# Altium PCB LED_Matrix.PcbDoc (part 1 of 2)
Units mm, origin at the board's own origin, x right, y up, seen from the top; angles counter-clockwise.
Board outline 50 x 80 mm, 2 copper layers (Top Layer, Bottom Layer); 384 components, 49 nets, 1536 pads, 0 vias.
Unrouted connection lines stored in the file: 1487.
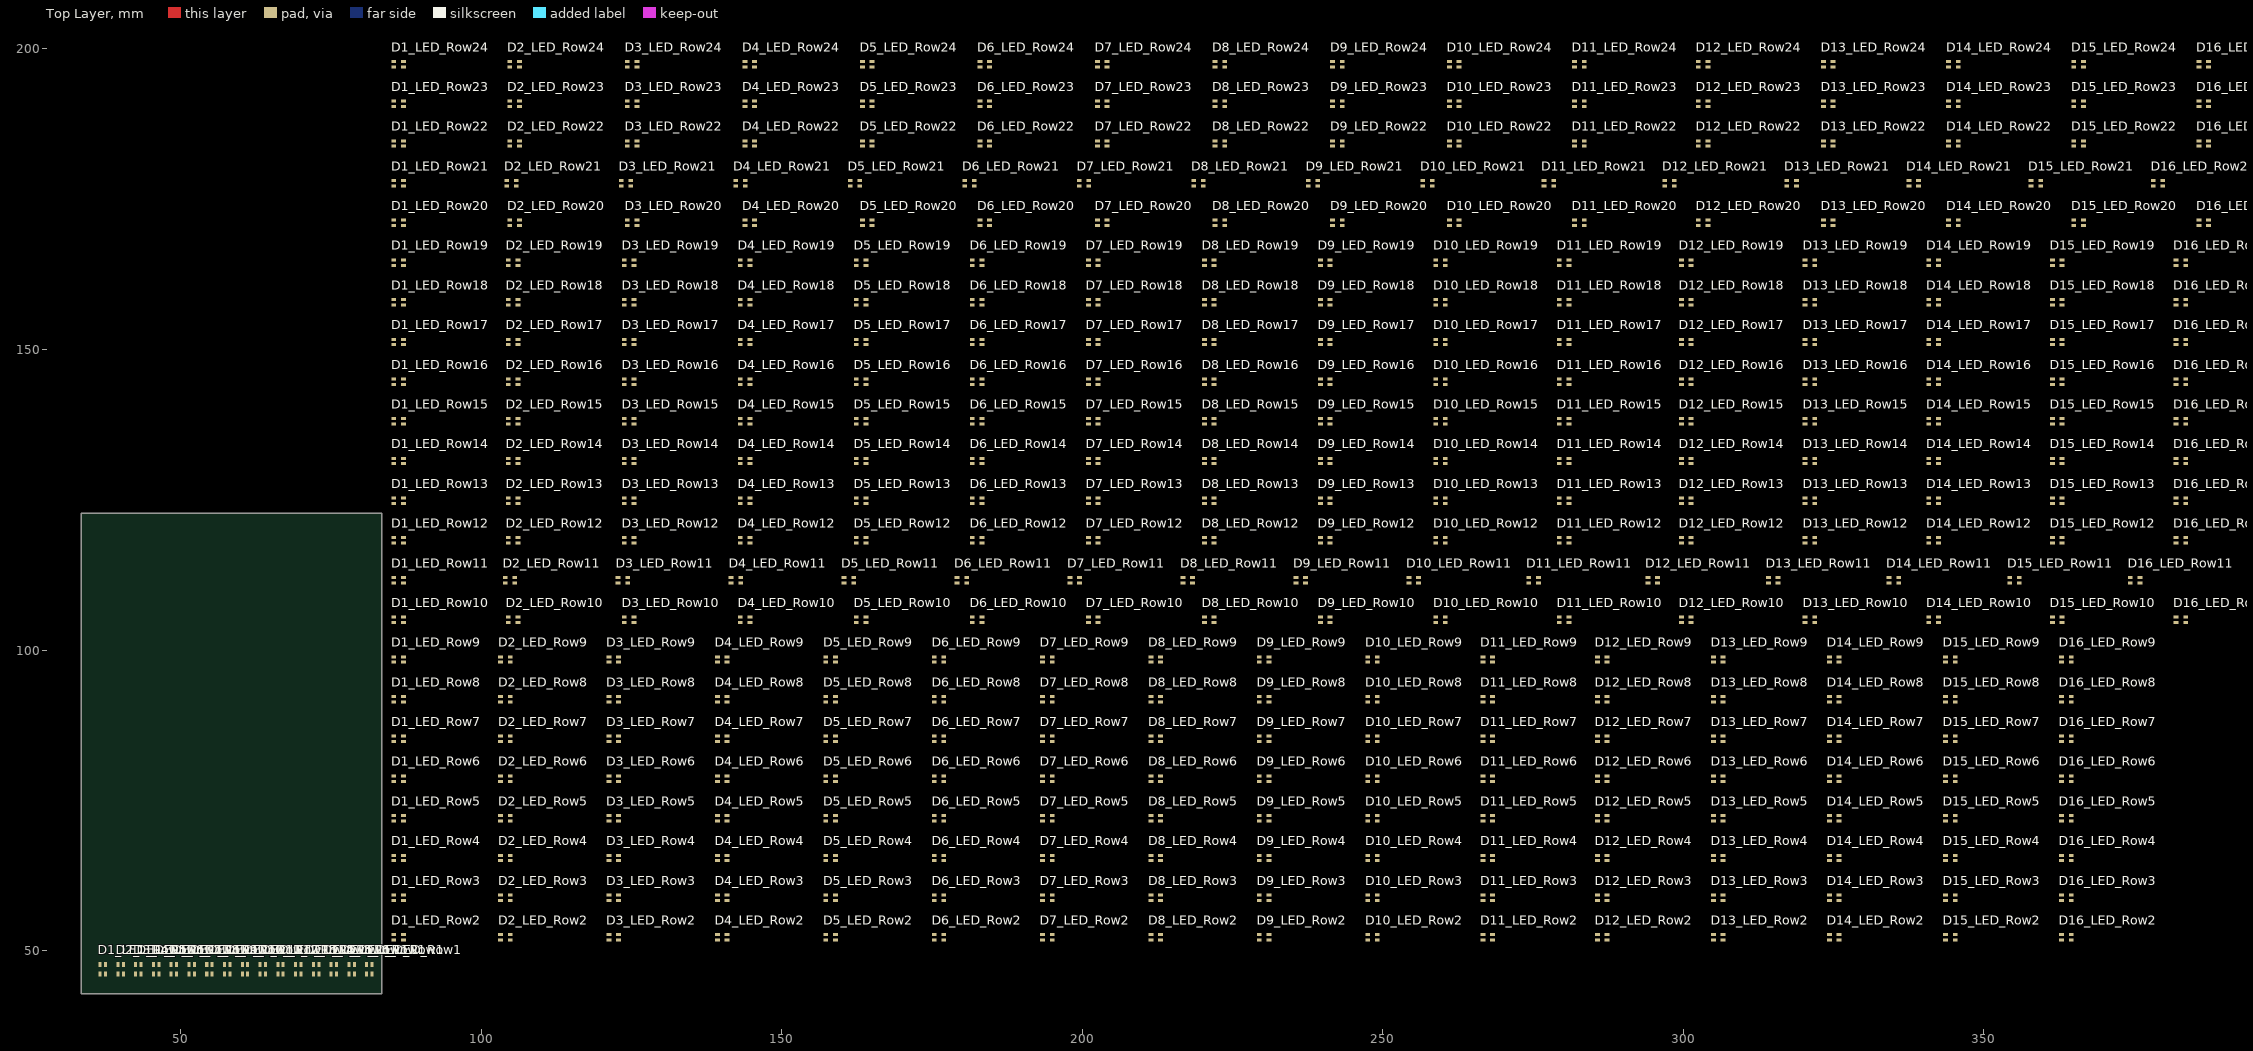
[diagram p0: Top Layer view]
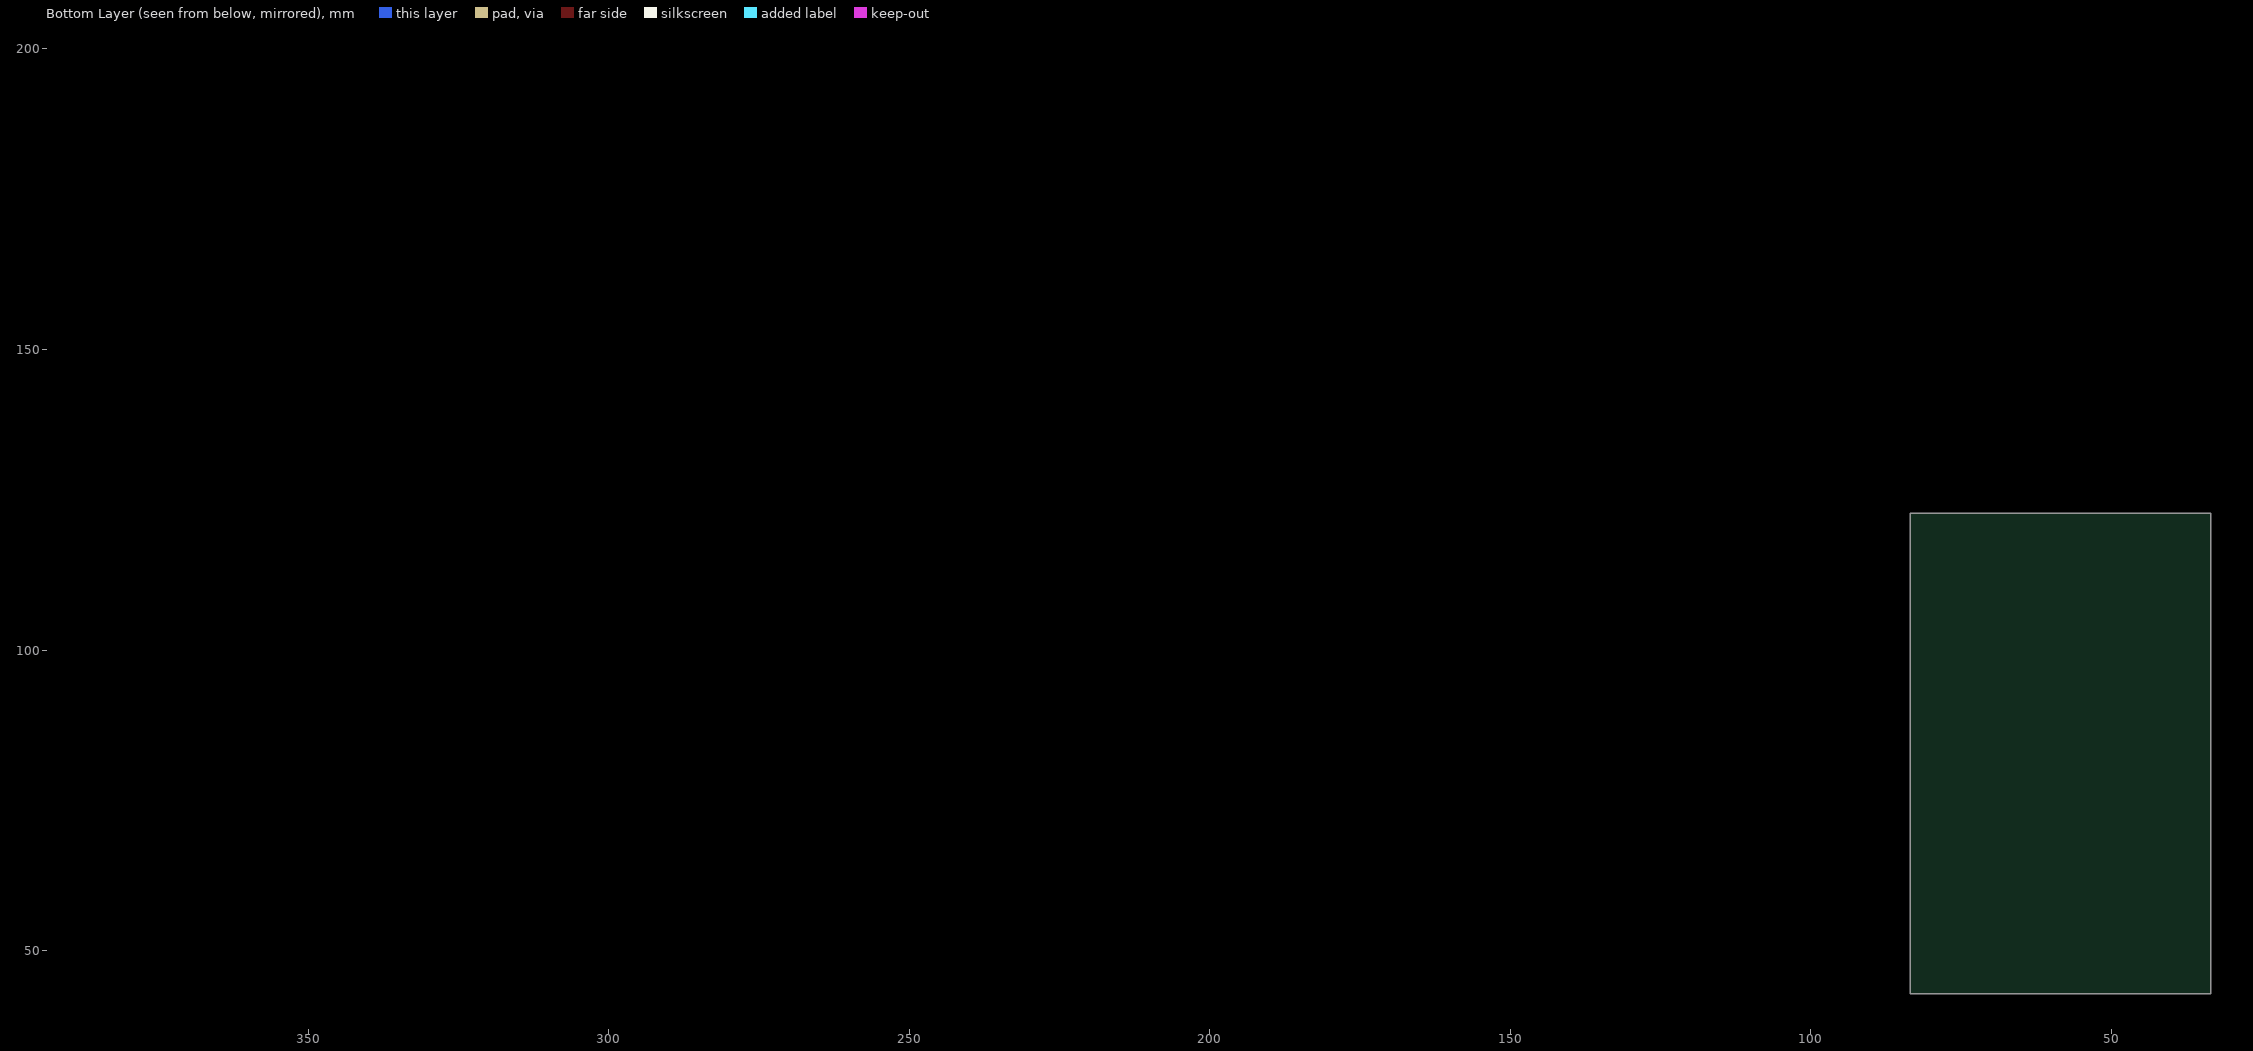
[diagram p1: Bottom Layer view, seen from below]

## Layer stack, top to bottom
Top Solder: solder mask 0.0102, Solder Resist, Dk 3.5
Top Layer: signal copper 0.0356
Dielectric 1: dielectric 0.32, FR-4, Dk 4.8
Bottom Layer: signal copper 0.0356
Bottom Solder: solder mask 0.0102, Solder Resist, Dk 3.5

## Board outline
33.401,42.799 33.401,122.799 83.401,122.799 83.401,42.799

## Design rules (kind name [scope] priority, off if disabled: settings)
Clearance [All] p1: gap=0.254 ignorepadtopadclearanceinfootprint=FALSE except(0: Arc-Hole Track-Hole SMDPad-Hole THPad-Hole Via-Hole Fill-Hole Poly-Hole Region-Hole Text-Hole)
PolygonConnect [All] p1: connectstyle=Relief reliefconductorwidth=0.254 reliefentries=4 polygonreliefangle="90 Angle" airgapwidth=0.254
RoomDefinition LED_Row1 [InComponentClass('LED_Row1')] p1: confinementstyle=ConfineIn formatcopy=TRUE lockcomponents=FALSE outline 33.401,44.292 83.401,44.292 83.401,49.626 33.401,49.626
RoomDefinition LED_Row24 [InComponentClass('LED_Row24')] p2: confinementstyle=ConfineIn formatcopy=TRUE lockcomponents=FALSE outline 84.582,196.215 404.876,196.215 404.876,201.549 84.582,201.549
RoomDefinition LED_Row23 [InComponentClass('LED_Row23')] p3: confinementstyle=ConfineIn formatcopy=TRUE lockcomponents=FALSE outline 84.582,189.611 404.876,189.611 404.876,194.945 84.582,194.945
RoomDefinition LED_Row22 [InComponentClass('LED_Row22')] p4: confinementstyle=ConfineIn formatcopy=TRUE lockcomponents=FALSE outline 84.582,183.007 404.876,183.007 404.876,188.341 84.582,188.341
RoomDefinition LED_Row21 [InComponentClass('LED_Row21')] p5: confinementstyle=ConfineIn formatcopy=TRUE lockcomponents=FALSE outline 84.582,176.403 396.748,176.403 396.748,181.737 84.582,181.737
RoomDefinition LED_Row20 [InComponentClass('LED_Row20')] p6: confinementstyle=ConfineIn formatcopy=TRUE lockcomponents=FALSE outline 84.582,169.799 404.876,169.799 404.876,175.133 84.582,175.133
RoomDefinition LED_Row19 [InComponentClass('LED_Row19')] p7: confinementstyle=ConfineIn formatcopy=TRUE lockcomponents=FALSE outline 84.582,163.195 400.812,163.195 400.812,168.529 84.582,168.529
RoomDefinition LED_Row18 [InComponentClass('LED_Row18')] p8: confinementstyle=ConfineIn formatcopy=TRUE lockcomponents=FALSE outline 84.582,156.591 400.812,156.591 400.812,161.925 84.582,161.925
RoomDefinition LED_Row17 [InComponentClass('LED_Row17')] p9: confinementstyle=ConfineIn formatcopy=TRUE lockcomponents=FALSE outline 84.582,149.987 400.812,149.987 400.812,155.321 84.582,155.321
RoomDefinition LED_Row16 [InComponentClass('LED_Row16')] p10: confinementstyle=ConfineIn formatcopy=TRUE lockcomponents=FALSE outline 84.582,143.383 400.812,143.383 400.812,148.717 84.582,148.717
RoomDefinition LED_Row15 [InComponentClass('LED_Row15')] p11: confinementstyle=ConfineIn formatcopy=TRUE lockcomponents=FALSE outline 84.582,136.779 400.812,136.779 400.812,142.113 84.582,142.113
RoomDefinition LED_Row14 [InComponentClass('LED_Row14')] p12: confinementstyle=ConfineIn formatcopy=TRUE lockcomponents=FALSE outline 84.582,130.175 400.812,130.175 400.812,135.509 84.582,135.509
RoomDefinition LED_Row13 [InComponentClass('LED_Row13')] p13: confinementstyle=ConfineIn formatcopy=TRUE lockcomponents=FALSE outline 84.582,123.571 400.812,123.571 400.812,128.905 84.582,128.905
RoomDefinition LED_Row12 [InComponentClass('LED_Row12')] p14: confinementstyle=ConfineIn formatcopy=TRUE lockcomponents=FALSE outline 84.582,116.967 400.812,116.967 400.812,122.301 84.582,122.301
RoomDefinition LED_Row11 [InComponentClass('LED_Row11')] p15: confinementstyle=ConfineIn formatcopy=TRUE lockcomponents=FALSE outline 84.582,110.363 392.684,110.363 392.684,115.697 84.582,115.697
RoomDefinition LED_Row10 [InComponentClass('LED_Row10')] p16: confinementstyle=ConfineIn formatcopy=TRUE lockcomponents=FALSE outline 84.582,103.759 400.812,103.759 400.812,109.093 84.582,109.093
RoomDefinition LED_Row9 [InComponentClass('LED_Row9')] p17: confinementstyle=ConfineIn formatcopy=TRUE lockcomponents=FALSE outline 84.582,97.155 380.492,97.155 380.492,102.489 84.582,102.489
RoomDefinition LED_Row8 [InComponentClass('LED_Row8')] p18: confinementstyle=ConfineIn formatcopy=TRUE lockcomponents=FALSE outline 84.582,90.551 380.492,90.551 380.492,95.885 84.582,95.885
RoomDefinition LED_Row7 [InComponentClass('LED_Row7')] p19: confinementstyle=ConfineIn formatcopy=TRUE lockcomponents=FALSE outline 84.582,83.947 380.492,83.947 380.492,89.281 84.582,89.281
RoomDefinition LED_Row6 [InComponentClass('LED_Row6')] p20: confinementstyle=ConfineIn formatcopy=TRUE lockcomponents=FALSE outline 84.582,77.343 380.492,77.343 380.492,82.677 84.582,82.677
RoomDefinition LED_Row5 [InComponentClass('LED_Row5')] p21: confinementstyle=ConfineIn formatcopy=TRUE lockcomponents=FALSE outline 84.582,70.739 380.492,70.739 380.492,76.073 84.582,76.073
RoomDefinition LED_Row4 [InComponentClass('LED_Row4')] p22: confinementstyle=ConfineIn formatcopy=TRUE lockcomponents=FALSE outline 84.582,64.135 380.492,64.135 380.492,69.469 84.582,69.469
RoomDefinition LED_Row3 [InComponentClass('LED_Row3')] p23: confinementstyle=ConfineIn formatcopy=TRUE lockcomponents=FALSE outline 84.582,57.531 380.492,57.531 380.492,62.865 84.582,62.865
RoomDefinition LED_Row2 [InComponentClass('LED_Row2')] p24: confinementstyle=ConfineIn formatcopy=TRUE lockcomponents=FALSE outline 84.582,50.927 380.492,50.927 380.492,56.261 84.582,56.261
RoutingVias [All] p1: holewidth=0.711 width=1.27 viastyle="Through Hole" minholewidth=0.711 minwidth=1.27 maxholewidth=0.711 maxwidth=1.27
SolderMaskExpansion [All] p1: expansion=0.102 istentingtop=FALSE
Width [All] p1: maxlimit=0.254 minlimit=0.254 preferedwidth=0.254
30 further rules are at their usual default settings.

## Classes and differential pairs
channel class LED_Row: LED_Row1 LED_Row2 LED_Row3 LED_Row4 LED_Row5 LED_Row6 LED_Row7 LED_Row8 LED_Row9 LED_Row10 LED_Row11 LED_Row12 LED_Row13 LED_Row14 LED_Row15 LED_Row16 LED_Row17 LED_Row18 LED_Row19 LED_Row20 LED_Row21 LED_Row22 LED_Row23 LED_Row24
component class LED_Row24: D1_LED_Row24 D2_LED_Row24 D3_LED_Row24 D4_LED_Row24 D5_LED_Row24 D6_LED_Row24 D7_LED_Row24 D8_LED_Row24 D9_LED_Row24 D10_LED_Row24 D11_LED_Row24 D12_LED_Row24 D13_LED_Row24 D14_LED_Row24 D15_LED_Row24 D16_LED_Row24
component class LED_Row23: D1_LED_Row23 D2_LED_Row23 D3_LED_Row23 D4_LED_Row23 D5_LED_Row23 D6_LED_Row23 D7_LED_Row23 D8_LED_Row23 D9_LED_Row23 D10_LED_Row23 D11_LED_Row23 D12_LED_Row23 D13_LED_Row23 D14_LED_Row23 D15_LED_Row23 D16_LED_Row23
component class LED_Row22: D1_LED_Row22 D2_LED_Row22 D3_LED_Row22 D4_LED_Row22 D5_LED_Row22 D6_LED_Row22 D7_LED_Row22 D8_LED_Row22 D9_LED_Row22 D10_LED_Row22 D11_LED_Row22 D12_LED_Row22 D13_LED_Row22 D14_LED_Row22 D15_LED_Row22 D16_LED_Row22
component class LED_Row21: D1_LED_Row21 D2_LED_Row21 D3_LED_Row21 D4_LED_Row21 D5_LED_Row21 D6_LED_Row21 D7_LED_Row21 D8_LED_Row21 D9_LED_Row21 D10_LED_Row21 D11_LED_Row21 D12_LED_Row21 D13_LED_Row21 D14_LED_Row21 D15_LED_Row21 D16_LED_Row21
component class LED_Row20: D1_LED_Row20 D2_LED_Row20 D3_LED_Row20 D4_LED_Row20 D5_LED_Row20 D6_LED_Row20 D7_LED_Row20 D8_LED_Row20 D9_LED_Row20 D10_LED_Row20 D11_LED_Row20 D12_LED_Row20 D13_LED_Row20 D14_LED_Row20 D15_LED_Row20 D16_LED_Row20
component class LED_Row19: D1_LED_Row19 D2_LED_Row19 D3_LED_Row19 D4_LED_Row19 D5_LED_Row19 D6_LED_Row19 D7_LED_Row19 D8_LED_Row19 D9_LED_Row19 D10_LED_Row19 D11_LED_Row19 D12_LED_Row19 D13_LED_Row19 D14_LED_Row19 D15_LED_Row19 D16_LED_Row19
component class LED_Row18: D1_LED_Row18 D2_LED_Row18 D3_LED_Row18 D4_LED_Row18 D5_LED_Row18 D6_LED_Row18 D7_LED_Row18 D8_LED_Row18 D9_LED_Row18 D10_LED_Row18 D11_LED_Row18 D12_LED_Row18 D13_LED_Row18 D14_LED_Row18 D15_LED_Row18 D16_LED_Row18
component class LED_Row17: D1_LED_Row17 D2_LED_Row17 D3_LED_Row17 D4_LED_Row17 D5_LED_Row17 D6_LED_Row17 D7_LED_Row17 D8_LED_Row17 D9_LED_Row17 D10_LED_Row17 D11_LED_Row17 D12_LED_Row17 D13_LED_Row17 D14_LED_Row17 D15_LED_Row17 D16_LED_Row17
component class LED_Row16: D1_LED_Row16 D2_LED_Row16 D3_LED_Row16 D4_LED_Row16 D5_LED_Row16 D6_LED_Row16 D7_LED_Row16 D8_LED_Row16 D9_LED_Row16 D10_LED_Row16 D11_LED_Row16 D12_LED_Row16 D13_LED_Row16 D14_LED_Row16 D15_LED_Row16 D16_LED_Row16
component class LED_Row15: D1_LED_Row15 D2_LED_Row15 D3_LED_Row15 D4_LED_Row15 D5_LED_Row15 D6_LED_Row15 D7_LED_Row15 D8_LED_Row15 D9_LED_Row15 D10_LED_Row15 D11_LED_Row15 D12_LED_Row15 D13_LED_Row15 D14_LED_Row15 D15_LED_Row15 D16_LED_Row15
component class LED_Row14: D1_LED_Row14 D2_LED_Row14 D3_LED_Row14 D4_LED_Row14 D5_LED_Row14 D6_LED_Row14 D7_LED_Row14 D8_LED_Row14 D9_LED_Row14 D10_LED_Row14 D11_LED_Row14 D12_LED_Row14 D13_LED_Row14 D14_LED_Row14 D15_LED_Row14 D16_LED_Row14
component class LED_Row13: D1_LED_Row13 D2_LED_Row13 D3_LED_Row13 D4_LED_Row13 D5_LED_Row13 D6_LED_Row13 D7_LED_Row13 D8_LED_Row13 D9_LED_Row13 D10_LED_Row13 D11_LED_Row13 D12_LED_Row13 D13_LED_Row13 D14_LED_Row13 D15_LED_Row13 D16_LED_Row13
component class LED_Row12: D1_LED_Row12 D2_LED_Row12 D3_LED_Row12 D4_LED_Row12 D5_LED_Row12 D6_LED_Row12 D7_LED_Row12 D8_LED_Row12 D9_LED_Row12 D10_LED_Row12 D11_LED_Row12 D12_LED_Row12 D13_LED_Row12 D14_LED_Row12 D15_LED_Row12 D16_LED_Row12
component class LED_Row11: D1_LED_Row11 D2_LED_Row11 D3_LED_Row11 D4_LED_Row11 D5_LED_Row11 D6_LED_Row11 D7_LED_Row11 D8_LED_Row11 D9_LED_Row11 D10_LED_Row11 D11_LED_Row11 D12_LED_Row11 D13_LED_Row11 D14_LED_Row11 D15_LED_Row11 D16_LED_Row11
component class LED_Row10: D1_LED_Row10 D2_LED_Row10 D3_LED_Row10 D4_LED_Row10 D5_LED_Row10 D6_LED_Row10 D7_LED_Row10 D8_LED_Row10 D9_LED_Row10 D10_LED_Row10 D11_LED_Row10 D12_LED_Row10 D13_LED_Row10 D14_LED_Row10 D15_LED_Row10 D16_LED_Row10
component class LED_Row9: D1_LED_Row9 D2_LED_Row9 D3_LED_Row9 D4_LED_Row9 D5_LED_Row9 D6_LED_Row9 D7_LED_Row9 D8_LED_Row9 D9_LED_Row9 D10_LED_Row9 D11_LED_Row9 D12_LED_Row9 D13_LED_Row9 D14_LED_Row9 D15_LED_Row9 D16_LED_Row9
component class LED_Row8: D1_LED_Row8 D2_LED_Row8 D3_LED_Row8 D4_LED_Row8 D5_LED_Row8 D6_LED_Row8 D7_LED_Row8 D8_LED_Row8 D9_LED_Row8 D10_LED_Row8 D11_LED_Row8 D12_LED_Row8 D13_LED_Row8 D14_LED_Row8 D15_LED_Row8 D16_LED_Row8
component class LED_Row7: D1_LED_Row7 D2_LED_Row7 D3_LED_Row7 D4_LED_Row7 D5_LED_Row7 D6_LED_Row7 D7_LED_Row7 D8_LED_Row7 D9_LED_Row7 D10_LED_Row7 D11_LED_Row7 D12_LED_Row7 D13_LED_Row7 D14_LED_Row7 D15_LED_Row7 D16_LED_Row7
component class LED_Row6: D1_LED_Row6 D2_LED_Row6 D3_LED_Row6 D4_LED_Row6 D5_LED_Row6 D6_LED_Row6 D7_LED_Row6 D8_LED_Row6 D9_LED_Row6 D10_LED_Row6 D11_LED_Row6 D12_LED_Row6 D13_LED_Row6 D14_LED_Row6 D15_LED_Row6 D16_LED_Row6
component class LED_Row5: D1_LED_Row5 D2_LED_Row5 D3_LED_Row5 D4_LED_Row5 D5_LED_Row5 D6_LED_Row5 D7_LED_Row5 D8_LED_Row5 D9_LED_Row5 D10_LED_Row5 D11_LED_Row5 D12_LED_Row5 D13_LED_Row5 D14_LED_Row5 D15_LED_Row5 D16_LED_Row5
component class LED_Row4: D1_LED_Row4 D2_LED_Row4 D3_LED_Row4 D4_LED_Row4 D5_LED_Row4 D6_LED_Row4 D7_LED_Row4 D8_LED_Row4 D9_LED_Row4 D10_LED_Row4 D11_LED_Row4 D12_LED_Row4 D13_LED_Row4 D14_LED_Row4 D15_LED_Row4 D16_LED_Row4
component class LED_Row3: D1_LED_Row3 D2_LED_Row3 D3_LED_Row3 D4_LED_Row3 D5_LED_Row3 D6_LED_Row3 D7_LED_Row3 D8_LED_Row3 D9_LED_Row3 D10_LED_Row3 D11_LED_Row3 D12_LED_Row3 D13_LED_Row3 D14_LED_Row3 D15_LED_Row3 D16_LED_Row3
component class LED_Row2: D1_LED_Row2 D2_LED_Row2 D3_LED_Row2 D4_LED_Row2 D5_LED_Row2 D6_LED_Row2 D7_LED_Row2 D8_LED_Row2 D9_LED_Row2 D10_LED_Row2 D11_LED_Row2 D12_LED_Row2 D13_LED_Row2 D14_LED_Row2 D15_LED_Row2 D16_LED_Row2
component class LED_Row1: D1_LED_Row1 D2_LED_Row1 D3_LED_Row1 D4_LED_Row1 D5_LED_Row1 D6_LED_Row1 D7_LED_Row1 D8_LED_Row1 D9_LED_Row1 D10_LED_Row1 D11_LED_Row1 D12_LED_Row1 D13_LED_Row1 D14_LED_Row1 D15_LED_Row1 D16_LED_Row1

## Components (designator, comment, footprint, x,y, rotation, side; value= is the part's Value field where it differs from the comment)
D1_LED_Row1 "LED-RGB-0000" LED-RGB-0000 37.032,46.901 r180 top (schematic designator D1)
D1_LED_Row2 "LED-RGB-0000" LED-RGB-0000 86.233,52.197 r90 top (schematic designator D1)
D1_LED_Row3 "LED-RGB-0000" LED-RGB-0000 86.233,58.801 r90 top (schematic designator D1)
D1_LED_Row4 "LED-RGB-0000" LED-RGB-0000 86.233,65.405 r90 top (schematic designator D1)
D1_LED_Row5 "LED-RGB-0000" LED-RGB-0000 86.233,72.009 r90 top (schematic designator D1)
D1_LED_Row6 "LED-RGB-0000" LED-RGB-0000 86.233,78.613 r90 top (schematic designator D1)
D1_LED_Row7 "LED-RGB-0000" LED-RGB-0000 86.233,85.217 r90 top (schematic designator D1)
D1_LED_Row8 "LED-RGB-0000" LED-RGB-0000 86.233,91.821 r90 top (schematic designator D1)
D1_LED_Row9 "LED-RGB-0000" LED-RGB-0000 86.233,98.425 r90 top (schematic designator D1)
D1_LED_Row10 "LED-RGB-0000" LED-RGB-0000 86.233,105.029 r90 top (schematic designator D1)
D1_LED_Row11 "LED-RGB-0000" LED-RGB-0000 86.233,111.633 r90 top (schematic designator D1)
D1_LED_Row12 "LED-RGB-0000" LED-RGB-0000 86.233,118.237 r90 top (schematic designator D1)
D1_LED_Row13 "LED-RGB-0000" LED-RGB-0000 86.233,124.841 r90 top (schematic designator D1)
D1_LED_Row14 "LED-RGB-0000" LED-RGB-0000 86.233,131.445 r90 top (schematic designator D1)
D1_LED_Row15 "LED-RGB-0000" LED-RGB-0000 86.233,138.049 r90 top (schematic designator D1)
D1_LED_Row16 "LED-RGB-0000" LED-RGB-0000 86.233,144.653 r90 top (schematic designator D1)
D1_LED_Row17 "LED-RGB-0000" LED-RGB-0000 86.233,151.257 r90 top (schematic designator D1)
D1_LED_Row18 "LED-RGB-0000" LED-RGB-0000 86.233,157.861 r90 top (schematic designator D1)
D1_LED_Row19 "LED-RGB-0000" LED-RGB-0000 86.233,164.465 r90 top (schematic designator D1)
D1_LED_Row20 "LED-RGB-0000" LED-RGB-0000 86.233,171.069 r90 top (schematic designator D1)
D1_LED_Row21 "LED-RGB-0000" LED-RGB-0000 86.233,177.673 r90 top (schematic designator D1)
D1_LED_Row22 "LED-RGB-0000" LED-RGB-0000 86.233,184.277 r90 top (schematic designator D1)
D1_LED_Row23 "LED-RGB-0000" LED-RGB-0000 86.233,190.881 r90 top (schematic designator D1)
D1_LED_Row24 "LED-RGB-0000" LED-RGB-0000 86.233,197.485 r90 top (schematic designator D1)
D2_LED_Row1 "LED-RGB-0000" LED-RGB-0000 39.989,46.901 r180 top (schematic designator D2)
D2_LED_Row2 "LED-RGB-0000" LED-RGB-0000 104.013,52.197 r90 top (schematic designator D2)
D2_LED_Row3 "LED-RGB-0000" LED-RGB-0000 104.013,58.801 r90 top (schematic designator D2)
D2_LED_Row4 "LED-RGB-0000" LED-RGB-0000 104.013,65.405 r90 top (schematic designator D2)
D2_LED_Row5 "LED-RGB-0000" LED-RGB-0000 104.013,72.009 r90 top (schematic designator D2)
D2_LED_Row6 "LED-RGB-0000" LED-RGB-0000 104.013,78.613 r90 top (schematic designator D2)
D2_LED_Row7 "LED-RGB-0000" LED-RGB-0000 104.013,85.217 r90 top (schematic designator D2)
D2_LED_Row8 "LED-RGB-0000" LED-RGB-0000 104.013,91.821 r90 top (schematic designator D2)
D2_LED_Row9 "LED-RGB-0000" LED-RGB-0000 104.013,98.425 r90 top (schematic designator D2)
D2_LED_Row10 "LED-RGB-0000" LED-RGB-0000 105.283,105.029 r90 top (schematic designator D2)
D2_LED_Row11 "LED-RGB-0000" LED-RGB-0000 104.775,111.633 r90 top (schematic designator D2)
D2_LED_Row12 "LED-RGB-0000" LED-RGB-0000 105.283,118.237 r90 top (schematic designator D2)
D2_LED_Row13 "LED-RGB-0000" LED-RGB-0000 105.283,124.841 r90 top (schematic designator D2)
D2_LED_Row14 "LED-RGB-0000" LED-RGB-0000 105.283,131.445 r90 top (schematic designator D2)
D2_LED_Row15 "LED-RGB-0000" LED-RGB-0000 105.283,138.049 r90 top (schematic designator D2)
D2_LED_Row16 "LED-RGB-0000" LED-RGB-0000 105.283,144.653 r90 top (schematic designator D2)
D2_LED_Row17 "LED-RGB-0000" LED-RGB-0000 105.283,151.257 r90 top (schematic designator D2)
D2_LED_Row18 "LED-RGB-0000" LED-RGB-0000 105.283,157.861 r90 top (schematic designator D2)
D2_LED_Row19 "LED-RGB-0000" LED-RGB-0000 105.283,164.465 r90 top (schematic designator D2)
D2_LED_Row20 "LED-RGB-0000" LED-RGB-0000 105.537,171.069 r90 top (schematic designator D2)
D2_LED_Row21 "LED-RGB-0000" LED-RGB-0000 105.029,177.673 r90 top (schematic designator D2)
D2_LED_Row22 "LED-RGB-0000" LED-RGB-0000 105.537,184.277 r90 top (schematic designator D2)
D2_LED_Row23 "LED-RGB-0000" LED-RGB-0000 105.537,190.881 r90 top (schematic designator D2)
D2_LED_Row24 "LED-RGB-0000" LED-RGB-0000 105.537,197.485 r90 top (schematic designator D2)
D3_LED_Row1 "LED-RGB-0000" LED-RGB-0000 42.946,46.901 r180 top (schematic designator D3)
D3_LED_Row2 "LED-RGB-0000" LED-RGB-0000 122.047,52.197 r90 top (schematic designator D3)
D3_LED_Row3 "LED-RGB-0000" LED-RGB-0000 122.047,58.801 r90 top (schematic designator D3)
D3_LED_Row4 "LED-RGB-0000" LED-RGB-0000 122.047,65.405 r90 top (schematic designator D3)
D3_LED_Row5 "LED-RGB-0000" LED-RGB-0000 122.047,72.009 r90 top (schematic designator D3)
D3_LED_Row6 "LED-RGB-0000" LED-RGB-0000 122.047,78.613 r90 top (schematic designator D3)
D3_LED_Row7 "LED-RGB-0000" LED-RGB-0000 122.047,85.217 r90 top (schematic designator D3)
D3_LED_Row8 "LED-RGB-0000" LED-RGB-0000 122.047,91.821 r90 top (schematic designator D3)
D3_LED_Row9 "LED-RGB-0000" LED-RGB-0000 122.047,98.425 r90 top (schematic designator D3)
D3_LED_Row10 "LED-RGB-0000" LED-RGB-0000 124.587,105.029 r90 top (schematic designator D3)
D3_LED_Row11 "LED-RGB-0000" LED-RGB-0000 123.571,111.633 r90 top (schematic designator D3)
D3_LED_Row12 "LED-RGB-0000" LED-RGB-0000 124.587,118.237 r90 top (schematic designator D3)
D3_LED_Row13 "LED-RGB-0000" LED-RGB-0000 124.587,124.841 r90 top (schematic designator D3)
D3_LED_Row14 "LED-RGB-0000" LED-RGB-0000 124.587,131.445 r90 top (schematic designator D3)
D3_LED_Row15 "LED-RGB-0000" LED-RGB-0000 124.587,138.049 r90 top (schematic designator D3)
D3_LED_Row16 "LED-RGB-0000" LED-RGB-0000 124.587,144.653 r90 top (schematic designator D3)
D3_LED_Row17 "LED-RGB-0000" LED-RGB-0000 124.587,151.257 r90 top (schematic designator D3)
D3_LED_Row18 "LED-RGB-0000" LED-RGB-0000 124.587,157.861 r90 top (schematic designator D3)
D3_LED_Row19 "LED-RGB-0000" LED-RGB-0000 124.587,164.465 r90 top (schematic designator D3)
D3_LED_Row20 "LED-RGB-0000" LED-RGB-0000 125.095,171.069 r90 top (schematic designator D3)
D3_LED_Row21 "LED-RGB-0000" LED-RGB-0000 124.079,177.673 r90 top (schematic designator D3)
D3_LED_Row22 "LED-RGB-0000" LED-RGB-0000 125.095,184.277 r90 top (schematic designator D3)
D3_LED_Row23 "LED-RGB-0000" LED-RGB-0000 125.095,190.881 r90 top (schematic designator D3)
D3_LED_Row24 "LED-RGB-0000" LED-RGB-0000 125.095,197.485 r90 top (schematic designator D3)
D4_LED_Row1 "LED-RGB-0000" LED-RGB-0000 45.903,46.901 r180 top (schematic designator D4)
D4_LED_Row2 "LED-RGB-0000" LED-RGB-0000 140.081,52.197 r90 top (schematic designator D4)
D4_LED_Row3 "LED-RGB-0000" LED-RGB-0000 140.081,58.801 r90 top (schematic designator D4)
D4_LED_Row4 "LED-RGB-0000" LED-RGB-0000 140.081,65.405 r90 top (schematic designator D4)
D4_LED_Row5 "LED-RGB-0000" LED-RGB-0000 140.081,72.009 r90 top (schematic designator D4)
D4_LED_Row6 "LED-RGB-0000" LED-RGB-0000 140.081,78.613 r90 top (schematic designator D4)
D4_LED_Row7 "LED-RGB-0000" LED-RGB-0000 140.081,85.217 r90 top (schematic designator D4)
D4_LED_Row8 "LED-RGB-0000" LED-RGB-0000 140.081,91.821 r90 top (schematic designator D4)
D4_LED_Row9 "LED-RGB-0000" LED-RGB-0000 140.081,98.425 r90 top (schematic designator D4)
D4_LED_Row10 "LED-RGB-0000" LED-RGB-0000 143.891,105.029 r90 top (schematic designator D4)
D4_LED_Row11 "LED-RGB-0000" LED-RGB-0000 142.367,111.633 r90 top (schematic designator D4)
D4_LED_Row12 "LED-RGB-0000" LED-RGB-0000 143.891,118.237 r90 top (schematic designator D4)
D4_LED_Row13 "LED-RGB-0000" LED-RGB-0000 143.891,124.841 r90 top (schematic designator D4)
D4_LED_Row14 "LED-RGB-0000" LED-RGB-0000 143.891,131.445 r90 top (schematic designator D4)
D4_LED_Row15 "LED-RGB-0000" LED-RGB-0000 143.891,138.049 r90 top (schematic designator D4)
D4_LED_Row16 "LED-RGB-0000" LED-RGB-0000 143.891,144.653 r90 top (schematic designator D4)
D4_LED_Row17 "LED-RGB-0000" LED-RGB-0000 143.891,151.257 r90 top (schematic designator D4)
D4_LED_Row18 "LED-RGB-0000" LED-RGB-0000 143.891,157.861 r90 top (schematic designator D4)
D4_LED_Row19 "LED-RGB-0000" LED-RGB-0000 143.891,164.465 r90 top (schematic designator D4)
D4_LED_Row20 "LED-RGB-0000" LED-RGB-0000 144.653,171.069 r90 top (schematic designator D4)
D4_LED_Row21 "LED-RGB-0000" LED-RGB-0000 143.129,177.673 r90 top (schematic designator D4)
D4_LED_Row22 "LED-RGB-0000" LED-RGB-0000 144.653,184.277 r90 top (schematic designator D4)
D4_LED_Row23 "LED-RGB-0000" LED-RGB-0000 144.653,190.881 r90 top (schematic designator D4)
D4_LED_Row24 "LED-RGB-0000" LED-RGB-0000 144.653,197.485 r90 top (schematic designator D4)
D5_LED_Row1 "LED-RGB-0000" LED-RGB-0000 48.859,46.901 r180 top (schematic designator D5)
D5_LED_Row2 "LED-RGB-0000" LED-RGB-0000 158.115,52.197 r90 top (schematic designator D5)
D5_LED_Row3 "LED-RGB-0000" LED-RGB-0000 158.115,58.801 r90 top (schematic designator D5)
D5_LED_Row4 "LED-RGB-0000" LED-RGB-0000 158.115,65.405 r90 top (schematic designator D5)
D5_LED_Row5 "LED-RGB-0000" LED-RGB-0000 158.115,72.009 r90 top (schematic designator D5)
D5_LED_Row6 "LED-RGB-0000" LED-RGB-0000 158.115,78.613 r90 top (schematic designator D5)
D5_LED_Row7 "LED-RGB-0000" LED-RGB-0000 158.115,85.217 r90 top (schematic designator D5)
D5_LED_Row8 "LED-RGB-0000" LED-RGB-0000 158.115,91.821 r90 top (schematic designator D5)
D5_LED_Row9 "LED-RGB-0000" LED-RGB-0000 158.115,98.425 r90 top (schematic designator D5)
D5_LED_Row10 "LED-RGB-0000" LED-RGB-0000 163.195,105.029 r90 top (schematic designator D5)
D5_LED_Row11 "LED-RGB-0000" LED-RGB-0000 161.163,111.633 r90 top (schematic designator D5)
D5_LED_Row12 "LED-RGB-0000" LED-RGB-0000 163.195,118.237 r90 top (schematic designator D5)
D5_LED_Row13 "LED-RGB-0000" LED-RGB-0000 163.195,124.841 r90 top (schematic designator D5)
D5_LED_Row14 "LED-RGB-0000" LED-RGB-0000 163.195,131.445 r90 top (schematic designator D5)
D5_LED_Row15 "LED-RGB-0000" LED-RGB-0000 163.195,138.049 r90 top (schematic designator D5)
D5_LED_Row16 "LED-RGB-0000" LED-RGB-0000 163.195,144.653 r90 top (schematic designator D5)
D5_LED_Row17 "LED-RGB-0000" LED-RGB-0000 163.195,151.257 r90 top (schematic designator D5)
D5_LED_Row18 "LED-RGB-0000" LED-RGB-0000 163.195,157.861 r90 top (schematic designator D5)
D5_LED_Row19 "LED-RGB-0000" LED-RGB-0000 163.195,164.465 r90 top (schematic designator D5)
D5_LED_Row20 "LED-RGB-0000" LED-RGB-0000 164.211,171.069 r90 top (schematic designator D5)
D5_LED_Row21 "LED-RGB-0000" LED-RGB-0000 162.179,177.673 r90 top (schematic designator D5)
D5_LED_Row22 "LED-RGB-0000" LED-RGB-0000 164.211,184.277 r90 top (schematic designator D5)
D5_LED_Row23 "LED-RGB-0000" LED-RGB-0000 164.211,190.881 r90 top (schematic designator D5)
D5_LED_Row24 "LED-RGB-0000" LED-RGB-0000 164.211,197.485 r90 top (schematic designator D5)
D6_LED_Row1 "LED-RGB-0000" LED-RGB-0000 51.816,46.901 r180 top (schematic designator D6)
D6_LED_Row2 "LED-RGB-0000" LED-RGB-0000 176.149,52.197 r90 top (schematic designator D6)
D6_LED_Row3 "LED-RGB-0000" LED-RGB-0000 176.149,58.801 r90 top (schematic designator D6)
D6_LED_Row4 "LED-RGB-0000" LED-RGB-0000 176.149,65.405 r90 top (schematic designator D6)
D6_LED_Row5 "LED-RGB-0000" LED-RGB-0000 176.149,72.009 r90 top (schematic designator D6)
D6_LED_Row6 "LED-RGB-0000" LED-RGB-0000 176.149,78.613 r90 top (schematic designator D6)
D6_LED_Row7 "LED-RGB-0000" LED-RGB-0000 176.149,85.217 r90 top (schematic designator D6)
D6_LED_Row8 "LED-RGB-0000" LED-RGB-0000 176.149,91.821 r90 top (schematic designator D6)
D6_LED_Row9 "LED-RGB-0000" LED-RGB-0000 176.149,98.425 r90 top (schematic designator D6)
D6_LED_Row10 "LED-RGB-0000" LED-RGB-0000 182.499,105.029 r90 top (schematic designator D6)
D6_LED_Row11 "LED-RGB-0000" LED-RGB-0000 179.959,111.633 r90 top (schematic designator D6)
D6_LED_Row12 "LED-RGB-0000" LED-RGB-0000 182.499,118.237 r90 top (schematic designator D6)
D6_LED_Row13 "LED-RGB-0000" LED-RGB-0000 182.499,124.841 r90 top (schematic designator D6)
D6_LED_Row14 "LED-RGB-0000" LED-RGB-0000 182.499,131.445 r90 top (schematic designator D6)
D6_LED_Row15 "LED-RGB-0000" LED-RGB-0000 182.499,138.049 r90 top (schematic designator D6)
D6_LED_Row16 "LED-RGB-0000" LED-RGB-0000 182.499,144.653 r90 top (schematic designator D6)
D6_LED_Row17 "LED-RGB-0000" LED-RGB-0000 182.499,151.257 r90 top (schematic designator D6)
D6_LED_Row18 "LED-RGB-0000" LED-RGB-0000 182.499,157.861 r90 top (schematic designator D6)
D6_LED_Row19 "LED-RGB-0000" LED-RGB-0000 182.499,164.465 r90 top (schematic designator D6)
D6_LED_Row20 "LED-RGB-0000" LED-RGB-0000 183.769,171.069 r90 top (schematic designator D6)
D6_LED_Row21 "LED-RGB-0000" LED-RGB-0000 181.229,177.673 r90 top (schematic designator D6)
D6_LED_Row22 "LED-RGB-0000" LED-RGB-0000 183.769,184.277 r90 top (schematic designator D6)
D6_LED_Row23 "LED-RGB-0000" LED-RGB-0000 183.769,190.881 r90 top (schematic designator D6)
D6_LED_Row24 "LED-RGB-0000" LED-RGB-0000 183.769,197.485 r90 top (schematic designator D6)
D7_LED_Row1 "LED-RGB-0000" LED-RGB-0000 54.773,46.901 r180 top (schematic designator D7)
D7_LED_Row2 "LED-RGB-0000" LED-RGB-0000 194.183,52.197 r90 top (schematic designator D7)
D7_LED_Row3 "LED-RGB-0000" LED-RGB-0000 194.183,58.801 r90 top (schematic designator D7)
D7_LED_Row4 "LED-RGB-0000" LED-RGB-0000 194.183,65.405 r90 top (schematic designator D7)
D7_LED_Row5 "LED-RGB-0000" LED-RGB-0000 194.183,72.009 r90 top (schematic designator D7)
D7_LED_Row6 "LED-RGB-0000" LED-RGB-0000 194.183,78.613 r90 top (schematic designator D7)
D7_LED_Row7 "LED-RGB-0000" LED-RGB-0000 194.183,85.217 r90 top (schematic designator D7)
D7_LED_Row8 "LED-RGB-0000" LED-RGB-0000 194.183,91.821 r90 top (schematic designator D7)
D7_LED_Row9 "LED-RGB-0000" LED-RGB-0000 194.183,98.425 r90 top (schematic designator D7)
D7_LED_Row10 "LED-RGB-0000" LED-RGB-0000 201.803,105.029 r90 top (schematic designator D7)
D7_LED_Row11 "LED-RGB-0000" LED-RGB-0000 198.755,111.633 r90 top (schematic designator D7)
D7_LED_Row12 "LED-RGB-0000" LED-RGB-0000 201.803,118.237 r90 top (schematic designator D7)
D7_LED_Row13 "LED-RGB-0000" LED-RGB-0000 201.803,124.841 r90 top (schematic designator D7)
D7_LED_Row14 "LED-RGB-0000" LED-RGB-0000 201.803,131.445 r90 top (schematic designator D7)
D7_LED_Row15 "LED-RGB-0000" LED-RGB-0000 201.803,138.049 r90 top (schematic designator D7)
D7_LED_Row16 "LED-RGB-0000" LED-RGB-0000 201.803,144.653 r90 top (schematic designator D7)
D7_LED_Row17 "LED-RGB-0000" LED-RGB-0000 201.803,151.257 r90 top (schematic designator D7)
D7_LED_Row18 "LED-RGB-0000" LED-RGB-0000 201.803,157.861 r90 top (schematic designator D7)
D7_LED_Row19 "LED-RGB-0000" LED-RGB-0000 201.803,164.465 r90 top (schematic designator D7)
D7_LED_Row20 "LED-RGB-0000" LED-RGB-0000 203.327,171.069 r90 top (schematic designator D7)
D7_LED_Row21 "LED-RGB-0000" LED-RGB-0000 200.279,177.673 r90 top (schematic designator D7)
D7_LED_Row22 "LED-RGB-0000" LED-RGB-0000 203.327,184.277 r90 top (schematic designator D7)
D7_LED_Row23 "LED-RGB-0000" LED-RGB-0000 203.327,190.881 r90 top (schematic designator D7)
D7_LED_Row24 "LED-RGB-0000" LED-RGB-0000 203.327,197.485 r90 top (schematic designator D7)
D8_LED_Row1 "LED-RGB-0000" LED-RGB-0000 57.729,46.901 r180 top (schematic designator D8)
D8_LED_Row2 "LED-RGB-0000" LED-RGB-0000 212.217,52.197 r90 top (schematic designator D8)
D8_LED_Row3 "LED-RGB-0000" LED-RGB-0000 212.217,58.801 r90 top (schematic designator D8)
D8_LED_Row4 "LED-RGB-0000" LED-RGB-0000 212.217,65.405 r90 top (schematic designator D8)
D8_LED_Row5 "LED-RGB-0000" LED-RGB-0000 212.217,72.009 r90 top (schematic designator D8)
D8_LED_Row6 "LED-RGB-0000" LED-RGB-0000 212.217,78.613 r90 top (schematic designator D8)
D8_LED_Row7 "LED-RGB-0000" LED-RGB-0000 212.217,85.217 r90 top (schematic designator D8)
D8_LED_Row8 "LED-RGB-0000" LED-RGB-0000 212.217,91.821 r90 top (schematic designator D8)
D8_LED_Row9 "LED-RGB-0000" LED-RGB-0000 212.217,98.425 r90 top (schematic designator D8)
D8_LED_Row10 "LED-RGB-0000" LED-RGB-0000 221.107,105.029 r90 top (schematic designator D8)
D8_LED_Row11 "LED-RGB-0000" LED-RGB-0000 217.551,111.633 r90 top (schematic designator D8)
D8_LED_Row12 "LED-RGB-0000" LED-RGB-0000 221.107,118.237 r90 top (schematic designator D8)
D8_LED_Row13 "LED-RGB-0000" LED-RGB-0000 221.107,124.841 r90 top (schematic designator D8)
D8_LED_Row14 "LED-RGB-0000" LED-RGB-0000 221.107,131.445 r90 top (schematic designator D8)
D8_LED_Row15 "LED-RGB-0000" LED-RGB-0000 221.107,138.049 r90 top (schematic designator D8)
D8_LED_Row16 "LED-RGB-0000" LED-RGB-0000 221.107,144.653 r90 top (schematic designator D8)
D8_LED_Row17 "LED-RGB-0000" LED-RGB-0000 221.107,151.257 r90 top (schematic designator D8)
D8_LED_Row18 "LED-RGB-0000" LED-RGB-0000 221.107,157.861 r90 top (schematic designator D8)
D8_LED_Row19 "LED-RGB-0000" LED-RGB-0000 221.107,164.465 r90 top (schematic designator D8)
D8_LED_Row20 "LED-RGB-0000" LED-RGB-0000 222.885,171.069 r90 top (schematic designator D8)
D8_LED_Row21 "LED-RGB-0000" LED-RGB-0000 219.329,177.673 r90 top (schematic designator D8)
D8_LED_Row22 "LED-RGB-0000" LED-RGB-0000 222.885,184.277 r90 top (schematic designator D8)
D8_LED_Row23 "LED-RGB-0000" LED-RGB-0000 222.885,190.881 r90 top (schematic designator D8)
D8_LED_Row24 "LED-RGB-0000" LED-RGB-0000 222.885,197.485 r90 top (schematic designator D8)
D9_LED_Row1 "LED-RGB-0000" LED-RGB-0000 60.686,46.901 r180 top (schematic designator D9)
D9_LED_Row2 "LED-RGB-0000" LED-RGB-0000 230.251,52.197 r90 top (schematic designator D9)
D9_LED_Row3 "LED-RGB-0000" LED-RGB-0000 230.251,58.801 r90 top (schematic designator D9)
D9_LED_Row4 "LED-RGB-0000" LED-RGB-0000 230.251,65.405 r90 top (schematic designator D9)
D9_LED_Row5 "LED-RGB-0000" LED-RGB-0000 230.251,72.009 r90 top (schematic designator D9)
D9_LED_Row6 "LED-RGB-0000" LED-RGB-0000 230.251,78.613 r90 top (schematic designator D9)
D9_LED_Row7 "LED-RGB-0000" LED-RGB-0000 230.251,85.217 r90 top (schematic designator D9)
D9_LED_Row8 "LED-RGB-0000" LED-RGB-0000 230.251,91.821 r90 top (schematic designator D9)
D9_LED_Row9 "LED-RGB-0000" LED-RGB-0000 230.251,98.425 r90 top (schematic designator D9)
D9_LED_Row10 "LED-RGB-0000" LED-RGB-0000 240.411,105.029 r90 top (schematic designator D9)
D9_LED_Row11 "LED-RGB-0000" LED-RGB-0000 236.347,111.633 r90 top (schematic designator D9)
D9_LED_Row12 "LED-RGB-0000" LED-RGB-0000 240.411,118.237 r90 top (schematic designator D9)
D9_LED_Row13 "LED-RGB-0000" LED-RGB-0000 240.411,124.841 r90 top (schematic designator D9)
D9_LED_Row14 "LED-RGB-0000" LED-RGB-0000 240.411,131.445 r90 top (schematic designator D9)
D9_LED_Row15 "LED-RGB-0000" LED-RGB-0000 240.411,138.049 r90 top (schematic designator D9)
D9_LED_Row16 "LED-RGB-0000" LED-RGB-0000 240.411,144.653 r90 top (schematic designator D9)
D9_LED_Row17 "LED-RGB-0000" LED-RGB-0000 240.411,151.257 r90 top (schematic designator D9)
D9_LED_Row18 "LED-RGB-0000" LED-RGB-0000 240.411,157.861 r90 top (schematic designator D9)
D9_LED_Row19 "LED-RGB-0000" LED-RGB-0000 240.411,164.465 r90 top (schematic designator D9)
D9_LED_Row20 "LED-RGB-0000" LED-RGB-0000 242.443,171.069 r90 top (schematic designator D9)
D9_LED_Row21 "LED-RGB-0000" LED-RGB-0000 238.379,177.673 r90 top (schematic designator D9)
D9_LED_Row22 "LED-RGB-0000" LED-RGB-0000 242.443,184.277 r90 top (schematic designator D9)
D9_LED_Row23 "LED-RGB-0000" LED-RGB-0000 242.443,190.881 r90 top (schematic designator D9)
D9_LED_Row24 "LED-RGB-0000" LED-RGB-0000 242.443,197.485 r90 top (schematic designator D9)
D10_LED_Row1 "LED-RGB-0000" LED-RGB-0000 63.643,46.901 r180 top (schematic designator D10)
D10_LED_Row2 "LED-RGB-0000" LED-RGB-0000 248.285,52.197 r90 top (schematic designator D10)
D10_LED_Row3 "LED-RGB-0000" LED-RGB-0000 248.285,58.801 r90 top (schematic designator D10)
D10_LED_Row4 "LED-RGB-0000" LED-RGB-0000 248.285,65.405 r90 top (schematic designator D10)
D10_LED_Row5 "LED-RGB-0000" LED-RGB-0000 248.285,72.009 r90 top (schematic designator D10)
D10_LED_Row6 "LED-RGB-0000" LED-RGB-0000 248.285,78.613 r90 top (schematic designator D10)
D10_LED_Row7 "LED-RGB-0000" LED-RGB-0000 248.285,85.217 r90 top (schematic designator D10)
D10_LED_Row8 "LED-RGB-0000" LED-RGB-0000 248.285,91.821 r90 top (schematic designator D10)
D10_LED_Row9 "LED-RGB-0000" LED-RGB-0000 248.285,98.425 r90 top (schematic designator D10)
D10_LED_Row10 "LED-RGB-0000" LED-RGB-0000 259.588,105.029 r90 top (schematic designator D10)
D10_LED_Row11 "LED-RGB-0000" LED-RGB-0000 255.143,111.633 r90 top (schematic designator D10)
D10_LED_Row12 "LED-RGB-0000" LED-RGB-0000 259.588,118.237 r90 top (schematic designator D10)
D10_LED_Row13 "LED-RGB-0000" LED-RGB-0000 259.588,124.841 r90 top (schematic designator D10)
D10_LED_Row14 "LED-RGB-0000" LED-RGB-0000 259.588,131.445 r90 top (schematic designator D10)
D10_LED_Row15 "LED-RGB-0000" LED-RGB-0000 259.588,138.049 r90 top (schematic designator D10)
D10_LED_Row16 "LED-RGB-0000" LED-RGB-0000 259.588,144.653 r90 top (schematic designator D10)
D10_LED_Row17 "LED-RGB-0000" LED-RGB-0000 259.588,151.257 r90 top (schematic designator D10)
D10_LED_Row18 "LED-RGB-0000" LED-RGB-0000 259.588,157.861 r90 top (schematic designator D10)
D10_LED_Row19 "LED-RGB-0000" LED-RGB-0000 259.588,164.465 r90 top (schematic designator D10)
D10_LED_Row20 "LED-RGB-0000" LED-RGB-0000 261.874,171.069 r90 top (schematic designator D10)
D10_LED_Row21 "LED-RGB-0000" LED-RGB-0000 257.429,177.673 r90 top (schematic designator D10)
D10_LED_Row22 "LED-RGB-0000" LED-RGB-0000 261.874,184.277 r90 top (schematic designator D10)
D10_LED_Row23 "LED-RGB-0000" LED-RGB-0000 261.874,190.881 r90 top (schematic designator D10)
D10_LED_Row24 "LED-RGB-0000" LED-RGB-0000 261.874,197.485 r90 top (schematic designator D10)
D11_LED_Row1 "LED-RGB-0000" LED-RGB-0000 66.6,46.901 r180 top (schematic designator D11)
D11_LED_Row2 "LED-RGB-0000" LED-RGB-0000 267.462,52.197 r90 top (schematic designator D11)
D11_LED_Row3 "LED-RGB-0000" LED-RGB-0000 267.462,58.801 r90 top (schematic designator D11)
D11_LED_Row4 "LED-RGB-0000" LED-RGB-0000 267.462,65.405 r90 top (schematic designator D11)
D11_LED_Row5 "LED-RGB-0000" LED-RGB-0000 267.462,72.009 r90 top (schematic designator D11)
D11_LED_Row6 "LED-RGB-0000" LED-RGB-0000 267.462,78.613 r90 top (schematic designator D11)
D11_LED_Row7 "LED-RGB-0000" LED-RGB-0000 267.462,85.217 r90 top (schematic designator D11)
D11_LED_Row8 "LED-RGB-0000" LED-RGB-0000 267.462,91.821 r90 top (schematic designator D11)
D11_LED_Row9 "LED-RGB-0000" LED-RGB-0000 267.462,98.425 r90 top (schematic designator D11)
D11_LED_Row10 "LED-RGB-0000" LED-RGB-0000 280.162,105.029 r90 top (schematic designator D11)
D11_LED_Row11 "LED-RGB-0000" LED-RGB-0000 275.082,111.633 r90 top (schematic designator D11)
D11_LED_Row12 "LED-RGB-0000" LED-RGB-0000 280.162,118.237 r90 top (schematic designator D11)
D11_LED_Row13 "LED-RGB-0000" LED-RGB-0000 280.162,124.841 r90 top (schematic designator D11)
D11_LED_Row14 "LED-RGB-0000" LED-RGB-0000 280.162,131.445 r90 top (schematic designator D11)
D11_LED_Row15 "LED-RGB-0000" LED-RGB-0000 280.162,138.049 r90 top (schematic designator D11)
D11_LED_Row16 "LED-RGB-0000" LED-RGB-0000 280.162,144.653 r90 top (schematic designator D11)
D11_LED_Row17 "LED-RGB-0000" LED-RGB-0000 280.162,151.257 r90 top (schematic designator D11)
D11_LED_Row18 "LED-RGB-0000" LED-RGB-0000 280.162,157.861 r90 top (schematic designator D11)
D11_LED_Row19 "LED-RGB-0000" LED-RGB-0000 280.162,164.465 r90 top (schematic designator D11)
D11_LED_Row20 "LED-RGB-0000" LED-RGB-0000 282.702,171.069 r90 top (schematic designator D11)
D11_LED_Row21 "LED-RGB-0000" LED-RGB-0000 277.622,177.673 r90 top (schematic designator D11)
D11_LED_Row22 "LED-RGB-0000" LED-RGB-0000 282.702,184.277 r90 top (schematic designator D11)
D11_LED_Row23 "LED-RGB-0000" LED-RGB-0000 282.702,190.881 r90 top (schematic designator D11)
D11_LED_Row24 "LED-RGB-0000" LED-RGB-0000 282.702,197.485 r90 top (schematic designator D11)
D12_LED_Row1 "LED-RGB-0000" LED-RGB-0000 69.556,46.901 r180 top (schematic designator D12)
D12_LED_Row2 "LED-RGB-0000" LED-RGB-0000 286.512,52.197 r90 top (schematic designator D12)
D12_LED_Row3 "LED-RGB-0000" LED-RGB-0000 286.512,58.801 r90 top (schematic designator D12)
D12_LED_Row4 "LED-RGB-0000" LED-RGB-0000 286.512,65.405 r90 top (schematic designator D12)
D12_LED_Row5 "LED-RGB-0000" LED-RGB-0000 286.512,72.009 r90 top (schematic designator D12)
D12_LED_Row6 "LED-RGB-0000" LED-RGB-0000 286.512,78.613 r90 top (schematic designator D12)
D12_LED_Row7 "LED-RGB-0000" LED-RGB-0000 286.512,85.217 r90 top (schematic designator D12)
D12_LED_Row8 "LED-RGB-0000" LED-RGB-0000 286.512,91.821 r90 top (schematic designator D12)
D12_LED_Row9 "LED-RGB-0000" LED-RGB-0000 286.512,98.425 r90 top (schematic designator D12)
D12_LED_Row10 "LED-RGB-0000" LED-RGB-0000 300.482,105.029 r90 top (schematic designator D12)
D12_LED_Row11 "LED-RGB-0000" LED-RGB-0000 294.894,111.633 r90 top (schematic designator D12)
D12_LED_Row12 "LED-RGB-0000" LED-RGB-0000 300.482,118.237 r90 top (schematic designator D12)
D12_LED_Row13 "LED-RGB-0000" LED-RGB-0000 300.482,124.841 r90 top (schematic designator D12)
D12_LED_Row14 "LED-RGB-0000" LED-RGB-0000 300.482,131.445 r90 top (schematic designator D12)
D12_LED_Row15 "LED-RGB-0000" LED-RGB-0000 300.482,138.049 r90 top (schematic designator D12)
D12_LED_Row16 "LED-RGB-0000" LED-RGB-0000 300.482,144.653 r90 top (schematic designator D12)
D12_LED_Row17 "LED-RGB-0000" LED-RGB-0000 300.482,151.257 r90 top (schematic designator D12)
D12_LED_Row18 "LED-RGB-0000" LED-RGB-0000 300.482,157.861 r90 top (schematic designator D12)
D12_LED_Row19 "LED-RGB-0000" LED-RGB-0000 300.482,164.465 r90 top (schematic designator D12)
D12_LED_Row20 "LED-RGB-0000" LED-RGB-0000 303.276,171.069 r90 top (schematic designator D12)
D12_LED_Row21 "LED-RGB-0000" LED-RGB-0000 297.688,177.673 r90 top (schematic designator D12)
D12_LED_Row22 "LED-RGB-0000" LED-RGB-0000 303.276,184.277 r90 top (schematic designator D12)
D12_LED_Row23 "LED-RGB-0000" LED-RGB-0000 303.276,190.881 r90 top (schematic designator D12)
D12_LED_Row24 "LED-RGB-0000" LED-RGB-0000 303.276,197.485 r90 top (schematic designator D12)
D13_LED_Row1 "LED-RGB-0000" LED-RGB-0000 72.513,46.901 r180 top (schematic designator D13)
D13_LED_Row2 "LED-RGB-0000" LED-RGB-0000 305.816,52.197 r90 top (schematic designator D13)
D13_LED_Row3 "LED-RGB-0000" LED-RGB-0000 305.816,58.801 r90 top (schematic designator D13)
D13_LED_Row4 "LED-RGB-0000" LED-RGB-0000 305.816,65.405 r90 top (schematic designator D13)
D13_LED_Row5 "LED-RGB-0000" LED-RGB-0000 305.816,72.009 r90 top (schematic designator D13)
D13_LED_Row6 "LED-RGB-0000" LED-RGB-0000 305.816,78.613 r90 top (schematic designator D13)
D13_LED_Row7 "LED-RGB-0000" LED-RGB-0000 305.816,85.217 r90 top (schematic designator D13)
D13_LED_Row8 "LED-RGB-0000" LED-RGB-0000 305.816,91.821 r90 top (schematic designator D13)
D13_LED_Row9 "LED-RGB-0000" LED-RGB-0000 305.816,98.425 r90 top (schematic designator D13)
D13_LED_Row10 "LED-RGB-0000" LED-RGB-0000 321.056,105.029 r90 top (schematic designator D13)
D13_LED_Row11 "LED-RGB-0000" LED-RGB-0000 314.96,111.633 r90 top (schematic designator D13)
D13_LED_Row12 "LED-RGB-0000" LED-RGB-0000 321.056,118.237 r90 top (schematic designator D13)
D13_LED_Row13 "LED-RGB-0000" LED-RGB-0000 321.056,124.841 r90 top (schematic designator D13)
D13_LED_Row14 "LED-RGB-0000" LED-RGB-0000 321.056,131.445 r90 top (schematic designator D13)
D13_LED_Row15 "LED-RGB-0000" LED-RGB-0000 321.056,138.049 r90 top (schematic designator D13)
D13_LED_Row16 "LED-RGB-0000" LED-RGB-0000 321.056,144.653 r90 top (schematic designator D13)
D13_LED_Row17 "LED-RGB-0000" LED-RGB-0000 321.056,151.257 r90 top (schematic designator D13)
D13_LED_Row18 "LED-RGB-0000" LED-RGB-0000 321.056,157.861 r90 top (schematic designator D13)
D13_LED_Row19 "LED-RGB-0000" LED-RGB-0000 321.056,164.465 r90 top (schematic designator D13)
D13_LED_Row20 "LED-RGB-0000" LED-RGB-0000 324.104,171.069 r90 top (schematic designator D13)
D13_LED_Row21 "LED-RGB-0000" LED-RGB-0000 318.008,177.673 r90 top (schematic designator D13)
D13_LED_Row22 "LED-RGB-0000" LED-RGB-0000 324.104,184.277 r90 top (schematic designator D13)
D13_LED_Row23 "LED-RGB-0000" LED-RGB-0000 324.104,190.881 r90 top (schematic designator D13)
D13_LED_Row24 "LED-RGB-0000" LED-RGB-0000 324.104,197.485 r90 top (schematic designator D13)
D14_LED_Row1 "LED-RGB-0000" LED-RGB-0000 75.47,46.901 r180 top (schematic designator D14)
D14_LED_Row2 "LED-RGB-0000" LED-RGB-0000 325.12,52.197 r90 top (schematic designator D14)
D14_LED_Row3 "LED-RGB-0000" LED-RGB-0000 325.12,58.801 r90 top (schematic designator D14)
D14_LED_Row4 "LED-RGB-0000" LED-RGB-0000 325.12,65.405 r90 top (schematic designator D14)
D14_LED_Row5 "LED-RGB-0000" LED-RGB-0000 325.12,72.009 r90 top (schematic designator D14)
D14_LED_Row6 "LED-RGB-0000" LED-RGB-0000 325.12,78.613 r90 top (schematic designator D14)
D14_LED_Row7 "LED-RGB-0000" LED-RGB-0000 325.12,85.217 r90 top (schematic designator D14)
D14_LED_Row8 "LED-RGB-0000" LED-RGB-0000 325.12,91.821 r90 top (schematic designator D14)
D14_LED_Row9 "LED-RGB-0000" LED-RGB-0000 325.12,98.425 r90 top (schematic designator D14)
D14_LED_Row10 "LED-RGB-0000" LED-RGB-0000 341.63,105.029 r90 top (schematic designator D14)
D14_LED_Row11 "LED-RGB-0000" LED-RGB-0000 335.026,111.633 r90 top (schematic designator D14)
D14_LED_Row12 "LED-RGB-0000" LED-RGB-0000 341.63,118.237 r90 top (schematic designator D14)
D14_LED_Row13 "LED-RGB-0000" LED-RGB-0000 341.63,124.841 r90 top (schematic designator D14)
D14_LED_Row14 "LED-RGB-0000" LED-RGB-0000 341.63,131.445 r90 top (schematic designator D14)
D14_LED_Row15 "LED-RGB-0000" LED-RGB-0000 341.63,138.049 r90 top (schematic designator D14)
D14_LED_Row16 "LED-RGB-0000" LED-RGB-0000 341.63,144.653 r90 top (schematic designator D14)
D14_LED_Row17 "LED-RGB-0000" LED-RGB-0000 341.63,151.257 r90 top (schematic designator D14)
D14_LED_Row18 "LED-RGB-0000" LED-RGB-0000 341.63,157.861 r90 top (schematic designator D14)
D14_LED_Row19 "LED-RGB-0000" LED-RGB-0000 341.63,164.465 r90 top (schematic designator D14)
D14_LED_Row20 "LED-RGB-0000" LED-RGB-0000 344.932,171.069 r90 top (schematic designator D14)
D14_LED_Row21 "LED-RGB-0000" LED-RGB-0000 338.328,177.673 r90 top (schematic designator D14)
D14_LED_Row22 "LED-RGB-0000" LED-RGB-0000 344.932,184.277 r90 top (schematic designator D14)
D14_LED_Row23 "LED-RGB-0000" LED-RGB-0000 344.932,190.881 r90 top (schematic designator D14)
D14_LED_Row24 "LED-RGB-0000" LED-RGB-0000 344.932,197.485 r90 top (schematic designator D14)
D15_LED_Row1 "LED-RGB-0000" LED-RGB-0000 78.427,46.901 r180 top (schematic designator D15)
D15_LED_Row2 "LED-RGB-0000" LED-RGB-0000 344.424,52.197 r90 top (schematic designator D15)
D15_LED_Row3 "LED-RGB-0000" LED-RGB-0000 344.424,58.801 r90 top (schematic designator D15)
D15_LED_Row4 "LED-RGB-0000" LED-RGB-0000 344.424,65.405 r90 top (schematic designator D15)
D15_LED_Row5 "LED-RGB-0000" LED-RGB-0000 344.424,72.009 r90 top (schematic designator D15)
D15_LED_Row6 "LED-RGB-0000" LED-RGB-0000 344.424,78.613 r90 top (schematic designator D15)
D15_LED_Row7 "LED-RGB-0000" LED-RGB-0000 344.424,85.217 r90 top (schematic designator D15)
D15_LED_Row8 "LED-RGB-0000" LED-RGB-0000 344.424,91.821 r90 top (schematic designator D15)
D15_LED_Row9 "LED-RGB-0000" LED-RGB-0000 344.424,98.425 r90 top (schematic designator D15)
D15_LED_Row10 "LED-RGB-0000" LED-RGB-0000 362.204,105.029 r90 top (schematic designator D15)
D15_LED_Row11 "LED-RGB-0000" LED-RGB-0000 355.092,111.633 r90 top (schematic designator D15)
D15_LED_Row12 "LED-RGB-0000" LED-RGB-0000 362.204,118.237 r90 top (schematic designator D15)
D15_LED_Row13 "LED-RGB-0000" LED-RGB-0000 362.204,124.841 r90 top (schematic designator D15)
D15_LED_Row14 "LED-RGB-0000" LED-RGB-0000 362.204,131.445 r90 top (schematic designator D15)
D15_LED_Row15 "LED-RGB-0000" LED-RGB-0000 362.204,138.049 r90 top (schematic designator D15)
D15_LED_Row16 "LED-RGB-0000" LED-RGB-0000 362.204,144.653 r90 top (schematic designator D15)
D15_LED_Row17 "LED-RGB-0000" LED-RGB-0000 362.204,151.257 r90 top (schematic designator D15)
D15_LED_Row18 "LED-RGB-0000" LED-RGB-0000 362.204,157.861 r90 top (schematic designator D15)
D15_LED_Row19 "LED-RGB-0000" LED-RGB-0000 362.204,164.465 r90 top (schematic designator D15)
D15_LED_Row20 "LED-RGB-0000" LED-RGB-0000 365.76,171.069 r90 top (schematic designator D15)
D15_LED_Row21 "LED-RGB-0000" LED-RGB-0000 358.648,177.673 r90 top (schematic designator D15)
D15_LED_Row22 "LED-RGB-0000" LED-RGB-0000 365.76,184.277 r90 top (schematic designator D15)
D15_LED_Row23 "LED-RGB-0000" LED-RGB-0000 365.76,190.881 r90 top (schematic designator D15)
D15_LED_Row24 "LED-RGB-0000" LED-RGB-0000 365.76,197.485 r90 top (schematic designator D15)
D16_LED_Row1 "LED-RGB-0000" LED-RGB-0000 81.383,46.901 r180 top (schematic designator D16)
D16_LED_Row2 "LED-RGB-0000" LED-RGB-0000 363.728,52.197 r90 top (schematic designator D16)
D16_LED_Row3 "LED-RGB-0000" LED-RGB-0000 363.728,58.801 r90 top (schematic designator D16)
D16_LED_Row4 "LED-RGB-0000" LED-RGB-0000 363.728,65.405 r90 top (schematic designator D16)
D16_LED_Row5 "LED-RGB-0000" LED-RGB-0000 363.728,72.009 r90 top (schematic designator D16)
D16_LED_Row6 "LED-RGB-0000" LED-RGB-0000 363.728,78.613 r90 top (schematic designator D16)
D16_LED_Row7 "LED-RGB-0000" LED-RGB-0000 363.728,85.217 r90 top (schematic designator D16)
D16_LED_Row8 "LED-RGB-0000" LED-RGB-0000 363.728,91.821 r90 top (schematic designator D16)
D16_LED_Row9 "LED-RGB-0000" LED-RGB-0000 363.728,98.425 r90 top (schematic designator D16)
D16_LED_Row10 "LED-RGB-0000" LED-RGB-0000 382.778,105.029 r90 top (schematic designator D16)
D16_LED_Row11 "LED-RGB-0000" LED-RGB-0000 375.158,111.633 r90 top (schematic designator D16)
D16_LED_Row12 "LED-RGB-0000" LED-RGB-0000 382.778,118.237 r90 top (schematic designator D16)
D16_LED_Row13 "LED-RGB-0000" LED-RGB-0000 382.778,124.841 r90 top (schematic designator D16)
D16_LED_Row14 "LED-RGB-0000" LED-RGB-0000 382.778,131.445 r90 top (schematic designator D16)
D16_LED_Row15 "LED-RGB-0000" LED-RGB-0000 382.778,138.049 r90 top (schematic designator D16)
D16_LED_Row16 "LED-RGB-0000" LED-RGB-0000 382.778,144.653 r90 top (schematic designator D16)
D16_LED_Row17 "LED-RGB-0000" LED-RGB-0000 382.778,151.257 r90 top (schematic designator D16)
D16_LED_Row18 "LED-RGB-0000" LED-RGB-0000 382.778,157.861 r90 top (schematic designator D16)
D16_LED_Row19 "LED-RGB-0000" LED-RGB-0000 382.778,164.465 r90 top (schematic designator D16)
D16_LED_Row20 "LED-RGB-0000" LED-RGB-0000 386.588,171.069 r90 top (schematic designator D16)
D16_LED_Row21 "LED-RGB-0000" LED-RGB-0000 378.968,177.673 r90 top (schematic designator D16)
D16_LED_Row22 "LED-RGB-0000" LED-RGB-0000 386.588,184.277 r90 top (schematic designator D16)
D16_LED_Row23 "LED-RGB-0000" LED-RGB-0000 386.588,190.881 r90 top (schematic designator D16)
D16_LED_Row24 "LED-RGB-0000" LED-RGB-0000 386.588,197.485 r90 top (schematic designator D16)

## Footprints (in the part's own frame and the unit in brackets; to place one, negate y for a bottom-side part, rotate by r counter-clockwise, add the part's x,y. Pads: shape width x height; smd on the part's side, far side on the other; paste and mask are expansions set on the pad)
LED-RGB-0000 [mm]
  rect 0.5x0.8 smd: 1(-0.45,0.8) 2(0.45,0.8) 3(0.45,-0.8) 4(-0.45,-0.8)
  body extent -0.8,-0.8 0.8,0.8, height 0.4